# EAGLE board singleNode (EAGLE 9.0.1)
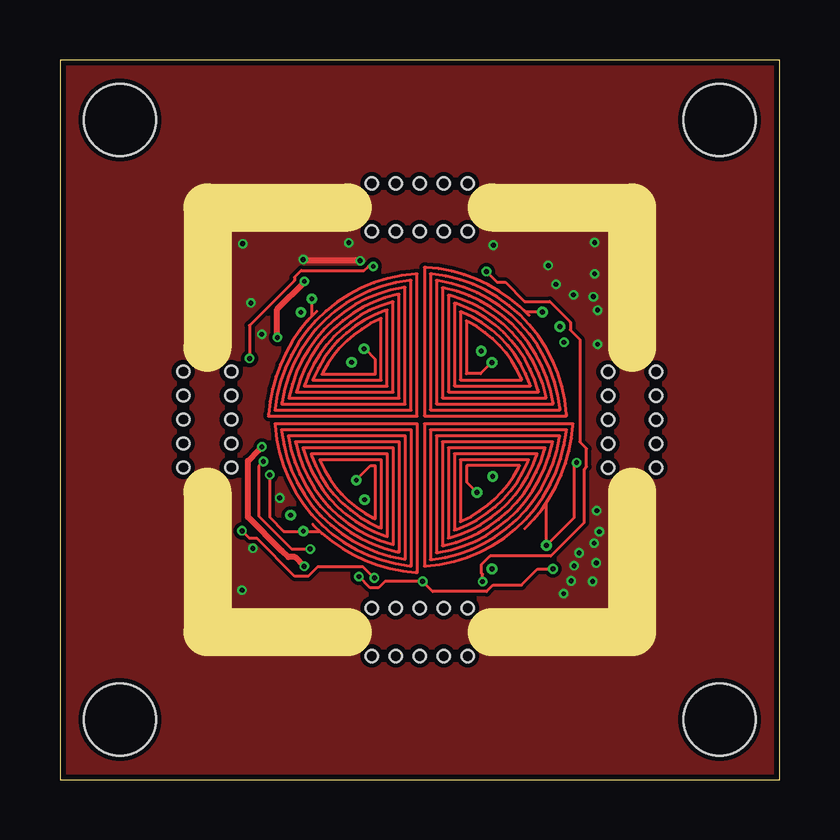
[diagram p0: board, top side]
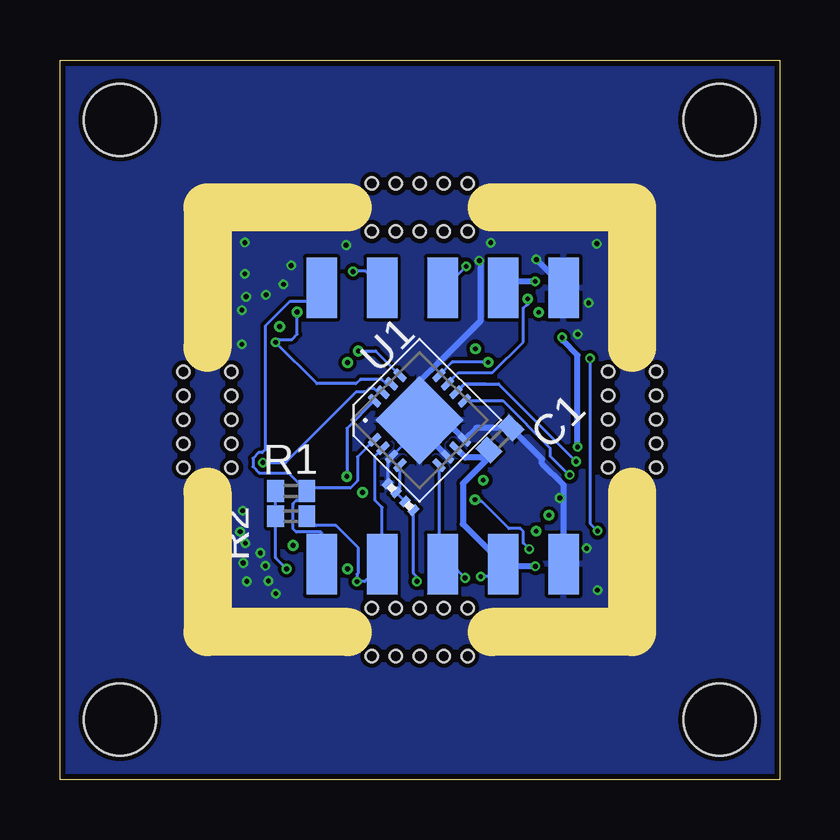
[diagram p1: board, bottom side, seen from below]

Size 30 x 30 mm. Coordinates in mm from the lower left corner, seen from the top.
Outline: 0,0 30,0 30,30 0,30 0,0
Copper layers (1+2*15+16): Top 0.035mm / dielectric 0.22mm / Route2 0.035mm / dielectric 0.99mm / Route15 0.035mm / dielectric 0.22mm / Bottom 0.035mm
Design rules "pcbtrain4l_narrowannulus *": minimum track width 0.125mm, minimum drill 0.2mm, track to track 0.15mm, track to pad 0.15mm, pad to pad 0.15mm, via to via 0.15mm, smd to smd 0mil, copper to edge 9mil, drill to drill 0.2mm, minimum pad ring 0.125mm, minimum via ring 0.1mm, stop-mask expansion 0.125mm, vias tented up to drill 0.6mm, thermal gap 6mil
Holes 3 mm at 2.5,2.5 27.5,2.5 2.5,27.5 27.5,27.5
Holes 0.5 mm at 13,22.85 14,22.85 15,22.85 16,22.85 17,22.85 13,24.85 14,24.85 15,24.85 16,24.85 17,24.85 7.14,13.01 7.14,14.01 7.14,15.01 7.14,16.01 7.14,17.01 5.14,13.01 5.14,14.01 5.14,15.01 5.14,16.01 5.14,17.01 24.85,13 24.85,14 24.85,15 24.85,16 24.85,17 22.85,13 22.85,14 22.85,15 22.85,16 22.85,17 13,5.15 14,5.15 15,5.15 16,5.15 17,5.15 13,7.15 14,7.15 15,7.15 16,7.15 17,7.15
Milling: 8 lines

## Footprints (pad centres in the part's own frame; a part is rotated, then mirrored left to right if it is on the bottom)
C0402 = smd 0.7 x 0.9: 1 -0.65,0; 2 0.65,0
SMD1,27-2,54 = smd 1.27 x 2.54: 1 0,0
R0402 = smd 0.7 x 0.9: 1 -0.65,0; 2 0.65,0
R0201 = smd 0.28 x 0.43: 1 -0.255,0; 2 0.255,0
WQFN-16 = smd 0.6 x 0.25: ADDR -1.9,-0.75; CLIKIN -1.9,-0.25; IN0A 1.9,-0.75; IN0B 1.9,-0.25; IN1A 1.9,0.25; IN1B 1.9,0.75; SCL -1.9,0.75; SDA -1.9,0.25 | smd 2.6 x 2.6: DAP 0,0 | smd 0.25 x 0.6: GND 0.75,-1.9; IN2A 0.75,1.9; IN2B 0.25,1.9; IN3A -0.25,1.9; IN3B -0.75,1.9; INTB -0.75,-1.9; SD -0.25,-1.9; VDD 0.25,-1.9
FAT_FAN = drill 0.2 pad 0.305: EXITCOIL0 -2.86,2.42; EXITCOIL1 -2.31,-3.31; EXITCOIL2B 2.55,2.89; EXITCOIL3 3.03,-2.35; INCOIL0 -4.51,5.06; INCOIL1 -4.86,-4.63; INCOIL2B 5.1,4.51; INCOIL3 5.27,-5.22; INT1_INT2_COIL0 -4.97,4.5; INT1_INT2_COIL1 -5.4,-3.96; INT1_INT2_COIL2B 5.83,3.91; INT1_INT2_COIL3 3,-6.2; TOP_INT1_COIL0 -2.33,2.98; TOP_INT1_COIL1 -2.66,-2.5; TOP_INT1_COIL3 2.38,-3.01; TOP_INT1_COIL12B 3,2.41

## Placement (x,y rotation side)
C1  10uF  [C0402]  11.66,14.2 45 bottom
PAD1  WIREPADSMD1,27-254  [SMD1,27-2,54]  11.53,20.5 0 bottom
PAD2  WIREPADSMD1,27-254  [SMD1,27-2,54]  11.53,8.98 180 bottom
PAD3  WIREPADSMD1,27-254  [SMD1,27-2,54]  9.01,8.98 180 bottom
PAD4  WIREPADSMD1,27-254  [SMD1,27-2,54]  9.01,20.5 0 bottom
PAD5  WIREPADSMD1,27-254  [SMD1,27-2,54]  14.05,8.98 0 bottom
PAD6  WIREPADSMD1,27-254  [SMD1,27-2,54]  16.57,8.98 0 bottom
PAD7  WIREPADSMD1,27-254  [SMD1,27-2,54]  19.09,8.98 0 bottom
PAD8  WIREPADSMD1,27-254  [SMD1,27-2,54]  14.05,20.5 0 bottom
PAD9  WIREPADSMD1,27-254  [SMD1,27-2,54]  16.57,20.5 0 bottom
PAD10  WIREPADSMD1,27-254  [SMD1,27-2,54]  19.09,20.5 0 bottom
R1  10k  [R0402]  20.36,12.03 180 bottom
R2  10k  [R0402]  20.36,10.98 180 bottom
R3  NOFIT  [R0201]  15.44,11.41 315 bottom
R4  NOFIT  [R0201]  16.17,12.16 315 bottom
U1  LDC1614  [WQFN-16]  15.01,14.98 45 bottom
U$2  FATFAN_GROUP  [FAT_FAN]  15.01,14.98 0 top

## Library data of the parts
C1 R1-R4 = resistor
PAD1-PAD10 = wirepad
U1 = LDC1614
U$2 = coils

## Nets
ADDR: R3.1 R4.2 U1.ADDR
GND: C1.2 PAD3.1 PAD4.1 R4.1 U1.CLIKIN U1.DAP U1.GND U1.SD
INTRPT: PAD5.1 PAD8.1 U1.INTB
N$6: U1.IN1A U$2.INCOIL0
N$7: U1.IN1B U$2.EXITCOIL0
N$8: U1.IN0A U$2.INCOIL1
N$9: U1.IN0B U$2.EXITCOIL1
N$10: U1.IN2A U$2.EXITCOIL2B
N$11: U1.IN2B U$2.INCOIL2B
N$12: U1.IN3A U$2.INCOIL3
N$13: U1.IN3B U$2.EXITCOIL3
SCL: PAD7.1 PAD10.1 R1.1 U1.SCL
SDA: PAD6.1 PAD9.1 R2.1 U1.SDA
VDD: C1.1 PAD1.1 PAD2.1 R1.2 R2.2 R3.2 U1.VDD

## Tracks (layer width: path | path; a pad name or v marks a point on that pad's centre or on a via)
ADDR
  Bottom 0.125: R3.1 15.99,11.96 | 15.99,11.96 R4.2 | U1.ADDR 15.82,12.13 15.99,11.96
GND  (via drill 0.2, 0.2 pad 0.1)
  Top 0.25: v10.14,21.68 v10.15,21.68 10.2,21.63 v12.52,21.63
  Bottom 0.125: PAD3.1 9.01,8.59 | R4.1 16.35,13.29 U1.CLIKIN 15.51,14.13 15.01,14.13
  Bottom 0.25: U1.DAP 15.01,14.63 U1.DAP | 15.01,13.39 15.01,14.13 15.01,14.32 | 15.01,14.32 U1.DAP | U1.DAP 13.95,14.98 U1.GND | 9.01,9.74 PAD3.1 9,12.27 9.91,13.18 9.91,13.36 C1.2 12.64,14.66 U1.GND | U1.DAP 15.01,16.61 14.2,17.42 14.18,17.42 12.77,18.83 | 12.77,18.83 12.76,18.82 12.45,19.13 12.45,21.59 12.44,21.6 12.47,21.63 v12.52,21.63 | 12.77,18.83 12.78,18.84 | v10.14,21.68 9.01,20.55 PAD4.1 | U1.SD 14.7,14.32 15.01,14.32 | U1.GND
  other vias: 8.04,9.64 22.49,10.33 22.27,9.85 21.65,9.45 21.31,8.28 20.68,20.65 20.36,21.43 21.41,20.21 22.42,19.57 7.96,19.87 7.62,22.34 22.29,22.39 22.29,21.08 22.24,20.13 22.42,18.15 22.36,9.03 22.21,8.26 21,7.75 21.44,8.91 7.59,7.9 22.38,11.21 12.04,22.38 18.07,22.28 8.41,18.56 9.16,11.74
  pour Bottom: -0.17,30.41 30.58,30.09 30.3,-0.34 -0.51,-0.28
  pour Top: -0.42,-0.28 -0.25,30.3 30.46,30.34 30.31,-0.34
INTRPT  (via drill 0.2, 0.2 pad 0.1, 0.2 pad 0.3)
  Top 0.125: v13.06,21.4 v13.07,21.39 12.86,21.39 12.69,21.22 10.06,21.22 9.78,20.94 9.78,20.8 7.9,18.93 v7.9,17.56 | v7.59,10.37 7.9,10.05 8.21,10.05 9.79,8.48 10.35,8.48 10.75,8.87 12.63,8.87 13.1,8.41 v13.11,8.41
  Bottom 0.125: v13.06,21.4 13.96,20.5 PAD8.1 | v7.9,17.56 7.9,10.68 v7.59,10.37 | v13.11,8.41 13.68,8.98 PAD5.1 14.2,9.13 U1.INTB
N$6
  Bottom 0.125: 10.54,19.76 10.5,19.8 U$2.INCOIL0 10.5,19.84 10.68,19.66 10.68,18.25 11.97,16.96 13.38,16.96 U1.IN1A
N$7
  Bottom 0.125: U$2.EXITCOIL0 13.65,17.4 U1.IN1B
N$8  (via drill 0.2)
  Top 0.125: v8.74,12.7 8.74,10.94 9.33,10.35 U$2.INCOIL1
  Bottom 0.125: U1.IN0A 11.54,15.79 9.57,13.82 9.57,13.49 8.78,12.7 v8.74,12.7
N$9  (via drill 0.2, 0.2 pad 0.1)
  Top 0.125: v8.48,13.26 8.29,13.07 8.29,10.98 9.66,9.61 v10.43,9.61
  Bottom 0.125: U$2.EXITCOIL1 12.62,11.59 12.41,11.59 11.28,10.46 10.81,10.46 10.68,10.34 10.68,9.86 v10.43,9.61 | v8.48,13.26 11.71,16.49 12.26,16.49
  Bottom 0.152: U1.IN0B 13.14,16.49 12.26,16.49
N$10
  Bottom 0.125: U1.IN2A | U$2.EXITCOIL2B 16.84,17.87 U1.IN2A
N$11  (via drill 0.2 pad 0.1)
  Bottom 0.125: U$2.INCOIL2B 20.11,18.57 20.33,18.35 20.89,18.35 v21.01,18.23 v21.01,18.22 19.29,16.5 17.66,16.5 17.48,16.68 16.59,16.68 16.41,16.5 U1.IN2B
N$12  (via drill 0.2 pad 0.1)
  Top 0.125: U$2.INCOIL3 21.44,10.92 21.44,13.12 v21.54,13.22
  Bottom 0.125: U1.IN3A | U1.IN3A 16.76,16.15 16.91,16.29 17.11,16.29 17.25,16.15 17.66,16.15 20.59,13.22 v21.54,13.22
N$13
  Bottom 0.125: U$2.EXITCOIL3 18.04,14.64 U1.IN3B
SCL
  Bottom 0.125: PAD7.1 19.09,10.29 19.12,10.32 20.15,10.32 20.27,10.44 20.27,11.49 | 20.27,11.47 20.28,11.48 20.27,11.49 | 20.27,11.49 20.27,11.52 20.15,11.64 20.1,11.64 R1.1 | R1.1 19.58,12.16 17.9,12.16 17.6,12.45 17.6,13.45 U1.SCL | R1.1 20.46,12.78 21.69,12.78 21.96,13.04 21.96,13.39 21.71,13.63 21.57,13.63 21.44,13.76 21.44,18.91 20.42,19.93 19.66,19.93 PAD10.1
SDA  (via drill 0.2 pad 0.1, 0.2 pad 0.3)
  Top 0.125: v17.62,8.25 17.62,8.55 17.57,8.6 17.57,8.96 17.93,9.32 20.46,9.32 21.86,10.72 21.86,12.95 21.96,13.04 21.96,13.79 21.67,14.08 21.67,18.35 21.28,18.74 21.28,19.07 20.42,19.93 19.37,19.93 18.57,20.73 18.23,20.73 v17.78,21.18
  Bottom 0.125: PAD9.1 17.26,21.19 v17.77,21.19 v17.78,21.18 | U1.SDA 16.88,13.46 16.88,11.66 16.57,11.35 PAD6.1 17.3,8.25 v17.62,8.25 17.62,8.55 17.57,8.6 17.57,9.67 18.5,10.59 19.32,10.59 R2.1
VDD  (via drill 0.2 pad 0.1, 0.2 pad 0.3)
  Top 0.125: v12.46,8.46 12.93,7.99 13.28,7.99 13.55,8.26 v15.12,8.26 | v15.13,8.27 v15.12,8.26 | v15.12,8.26 15.54,7.84 17.79,7.84 18.06,8.11 19.24,8.11 19.91,8.78 v20.55,8.78
  Top 0.25: v9.06,18.43 9.06,19.61 10.19,20.74 v10.19,20.77 | v8.42,13.87 8.29,13.73 8.28,13.73 7.83,13.29 7.83,10.94 9.23,9.55 9.25,9.55 9.52,9.27 9.8,9.27 v10.18,8.89
  Bottom 0.125: PAD2.1 12.05,8.46 v12.46,8.46 | v15.12,8.26 15.12,8.45 15.26,8.59 R3.2 | R1.2 R2.2 21.01,9.24 v20.55,8.78
  Bottom 0.25: 11.53,10 PAD2.1 | 11.53,21.42 PAD1.1 | 11.53,20.15 PAD1.1 | v9.06,18.43 9.04,18.41 9.04,18.3 8.42,17.68 v8.42,13.87 | v10.19,20.77 11.26,20.77 PAD1.1 | U1.VDD | U1.VDD 13.1,13.42 12.44,13.42 C1.1 12.12,13.42 13.2,12.34 13.2,10.65 PAD2.1 | v10.18,8.89 11.44,8.89 PAD2.1